# Altium PCB main.PcbDoc
Units mil, origin at the board's own origin, x right, y up, seen from the top; angles counter-clockwise.
Board outline 1730 x 1730 mil, 2 copper layers (Top Layer, Bottom Layer); 27 components, 36 nets, 141 pads, 43 vias.
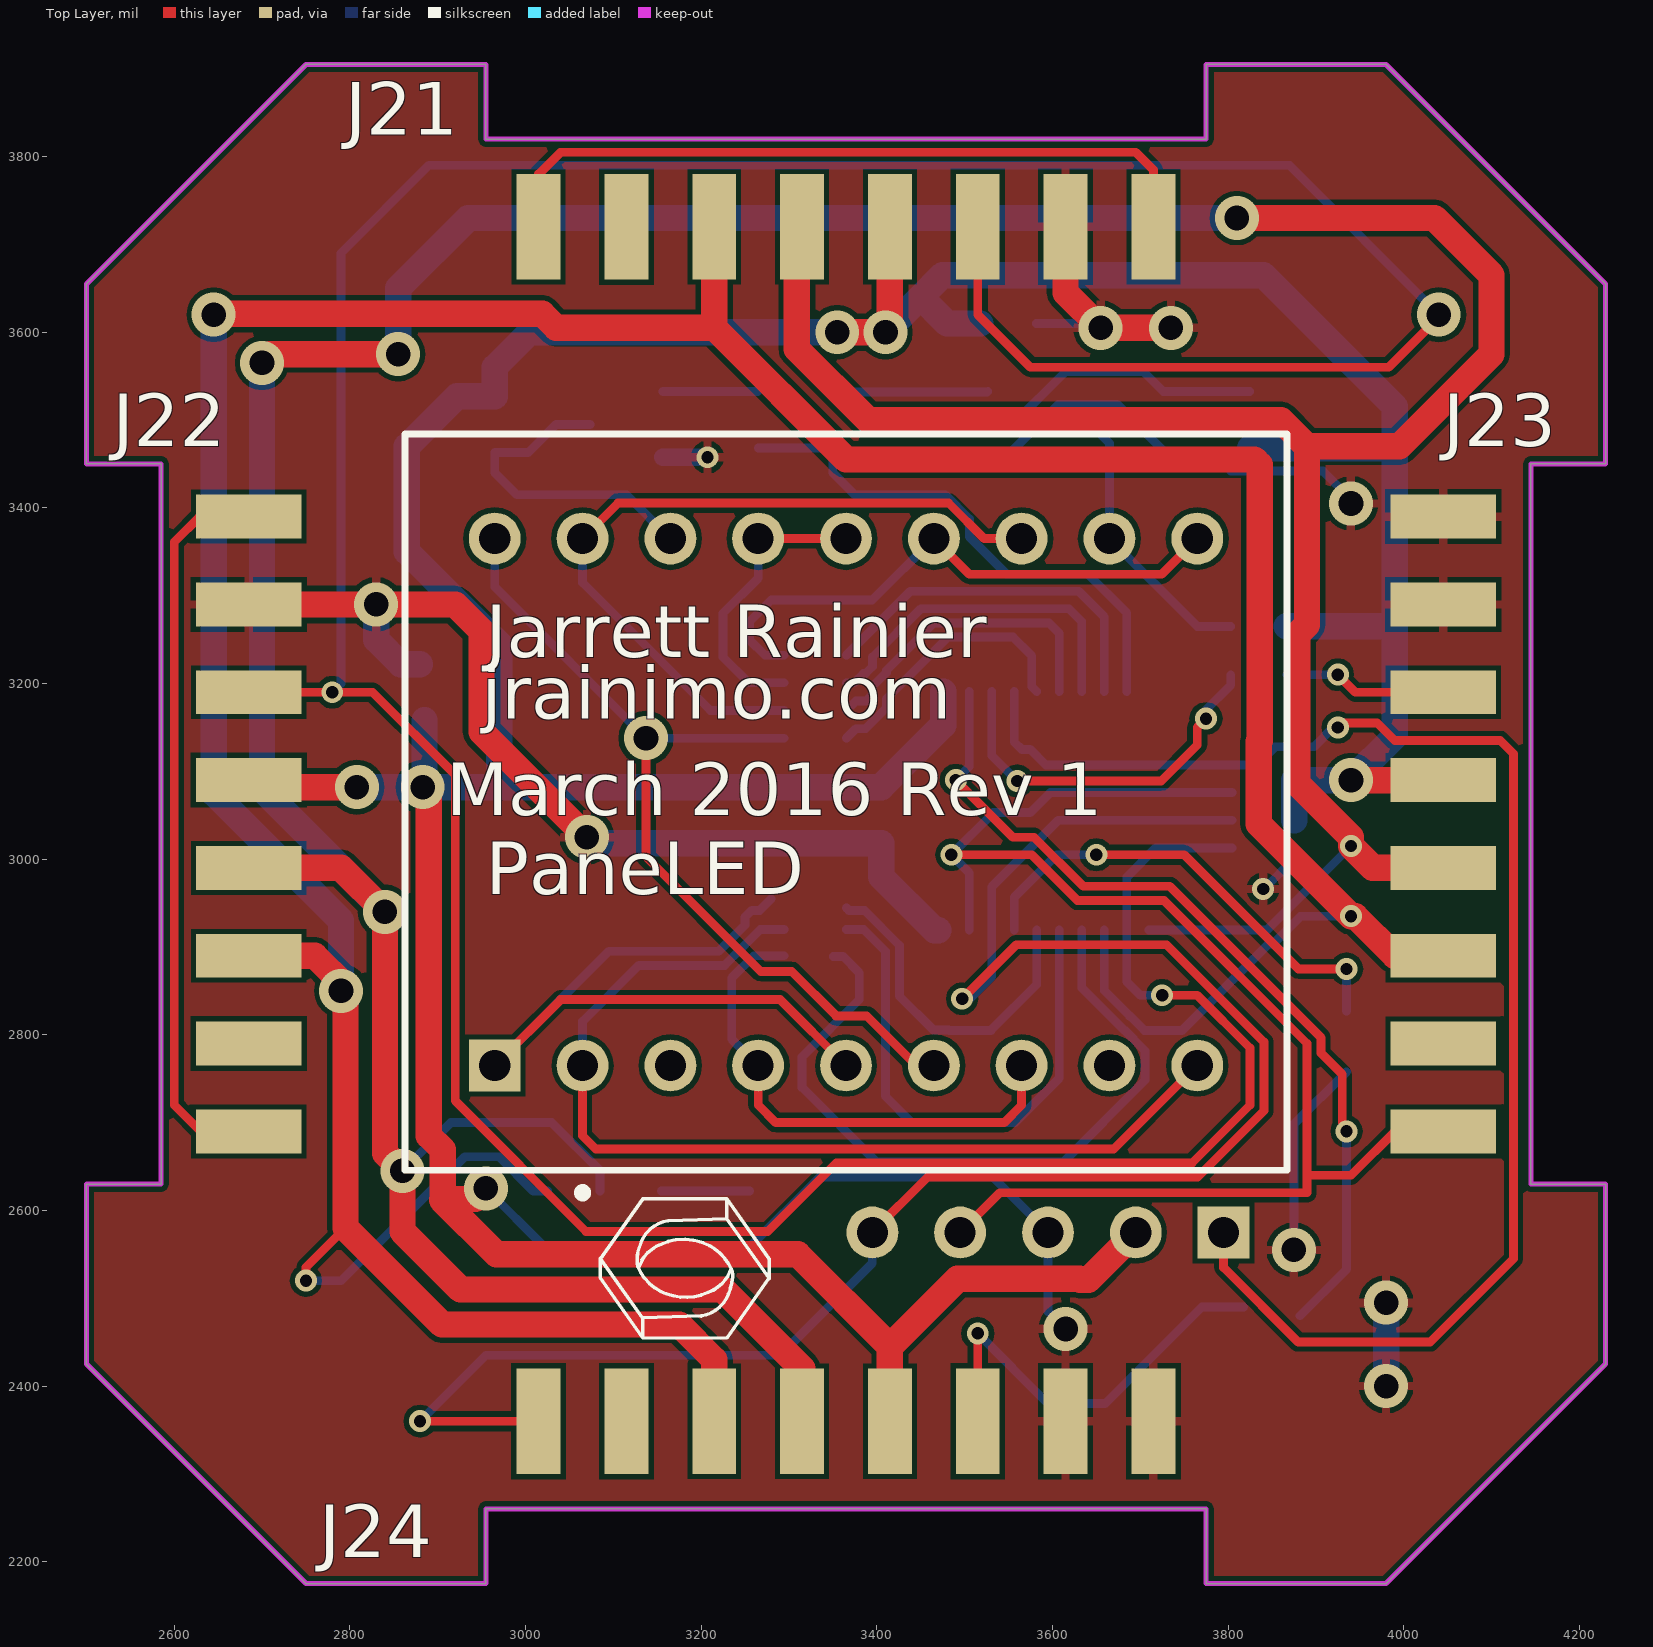
[diagram p0: Top Layer view]
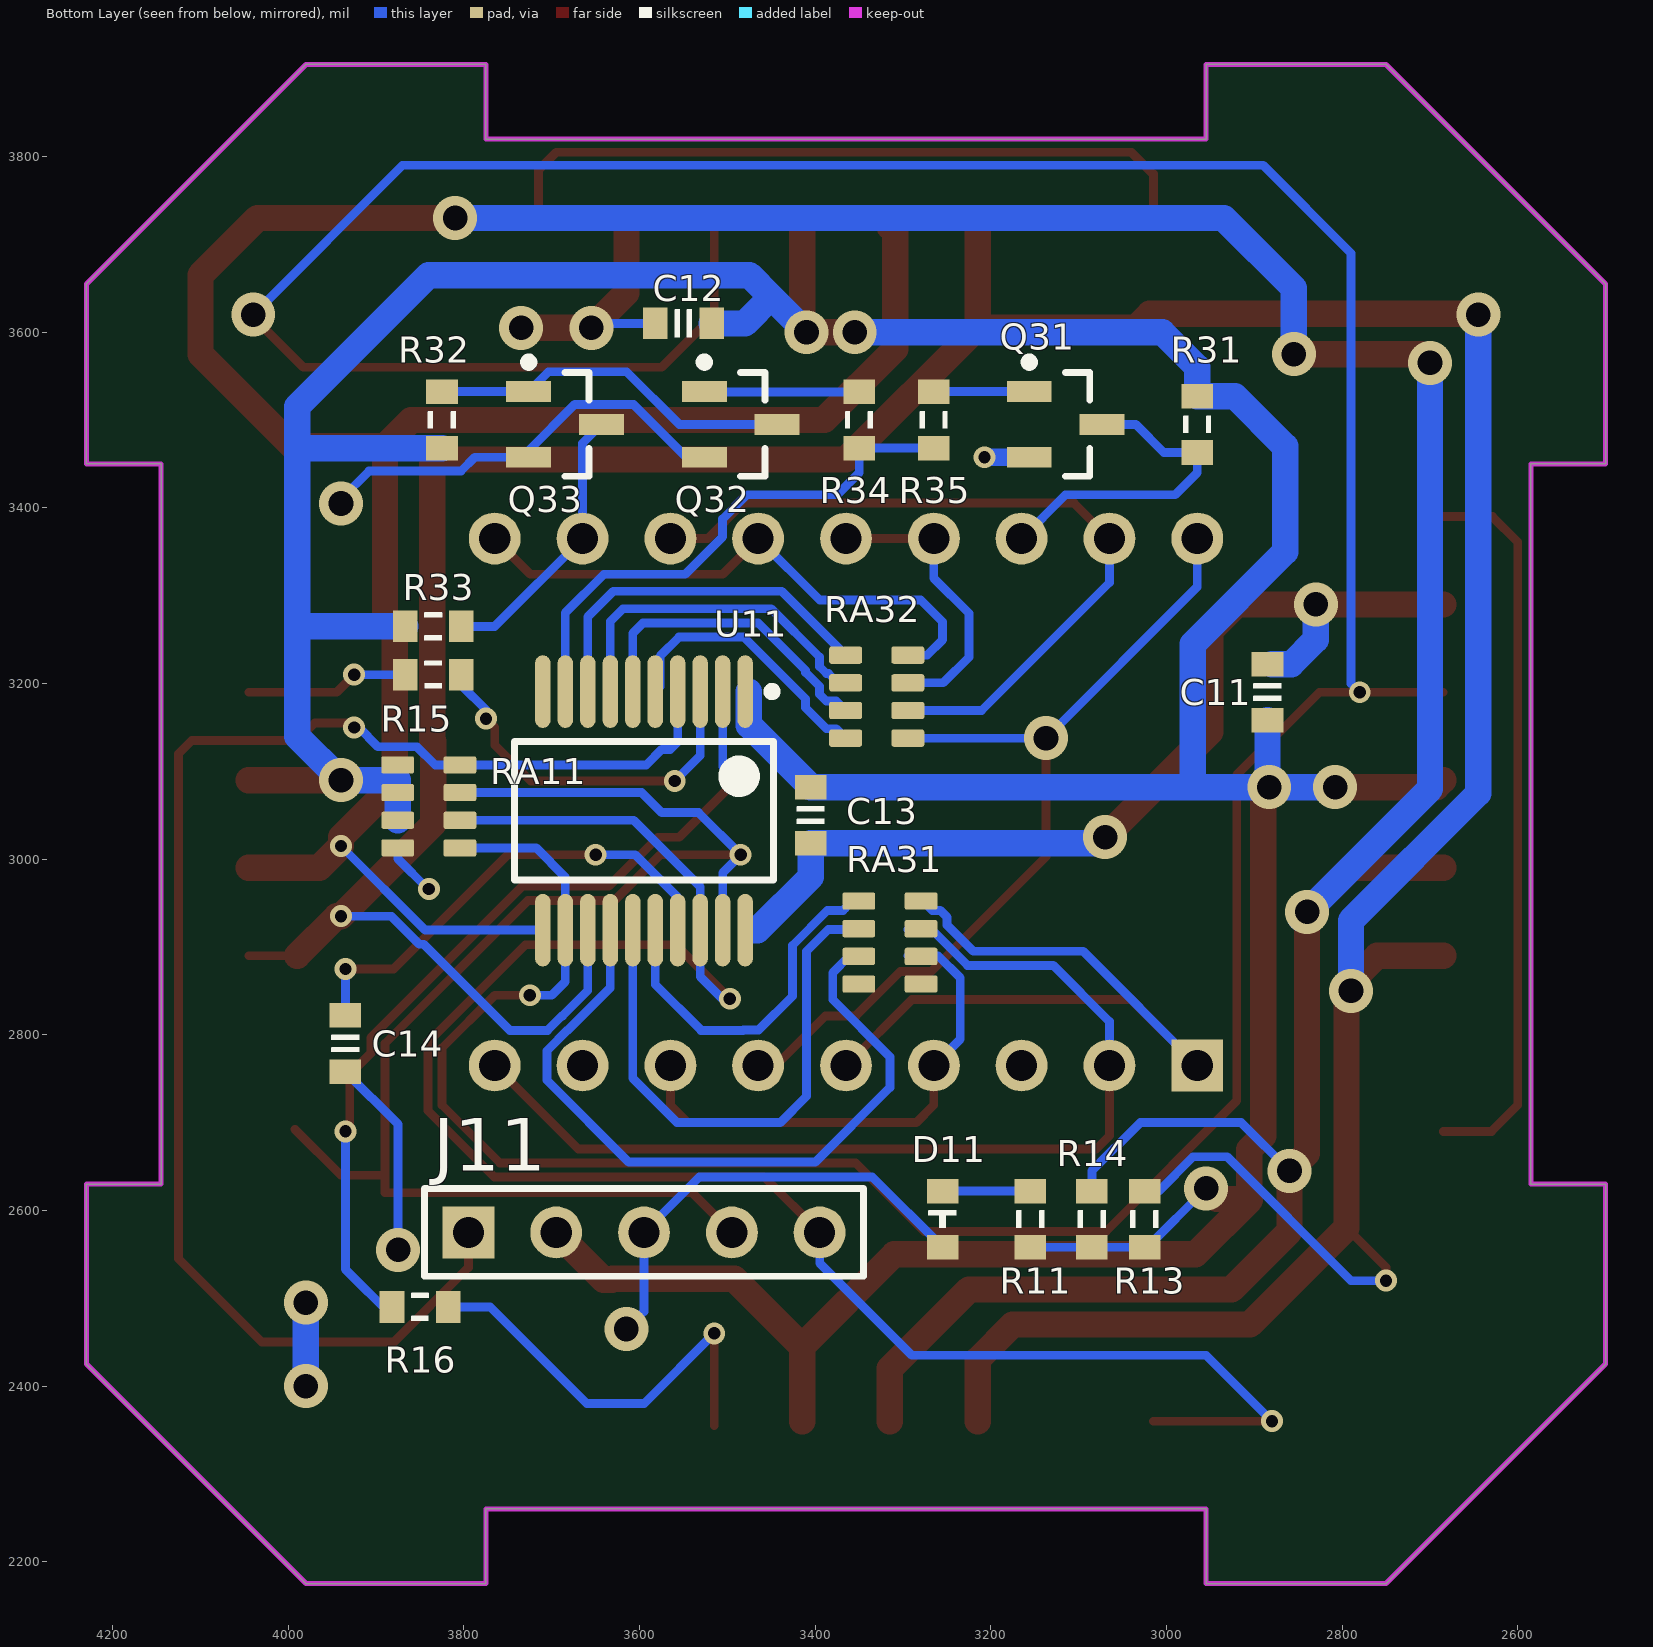
[diagram p1: Bottom Layer view, seen from below]
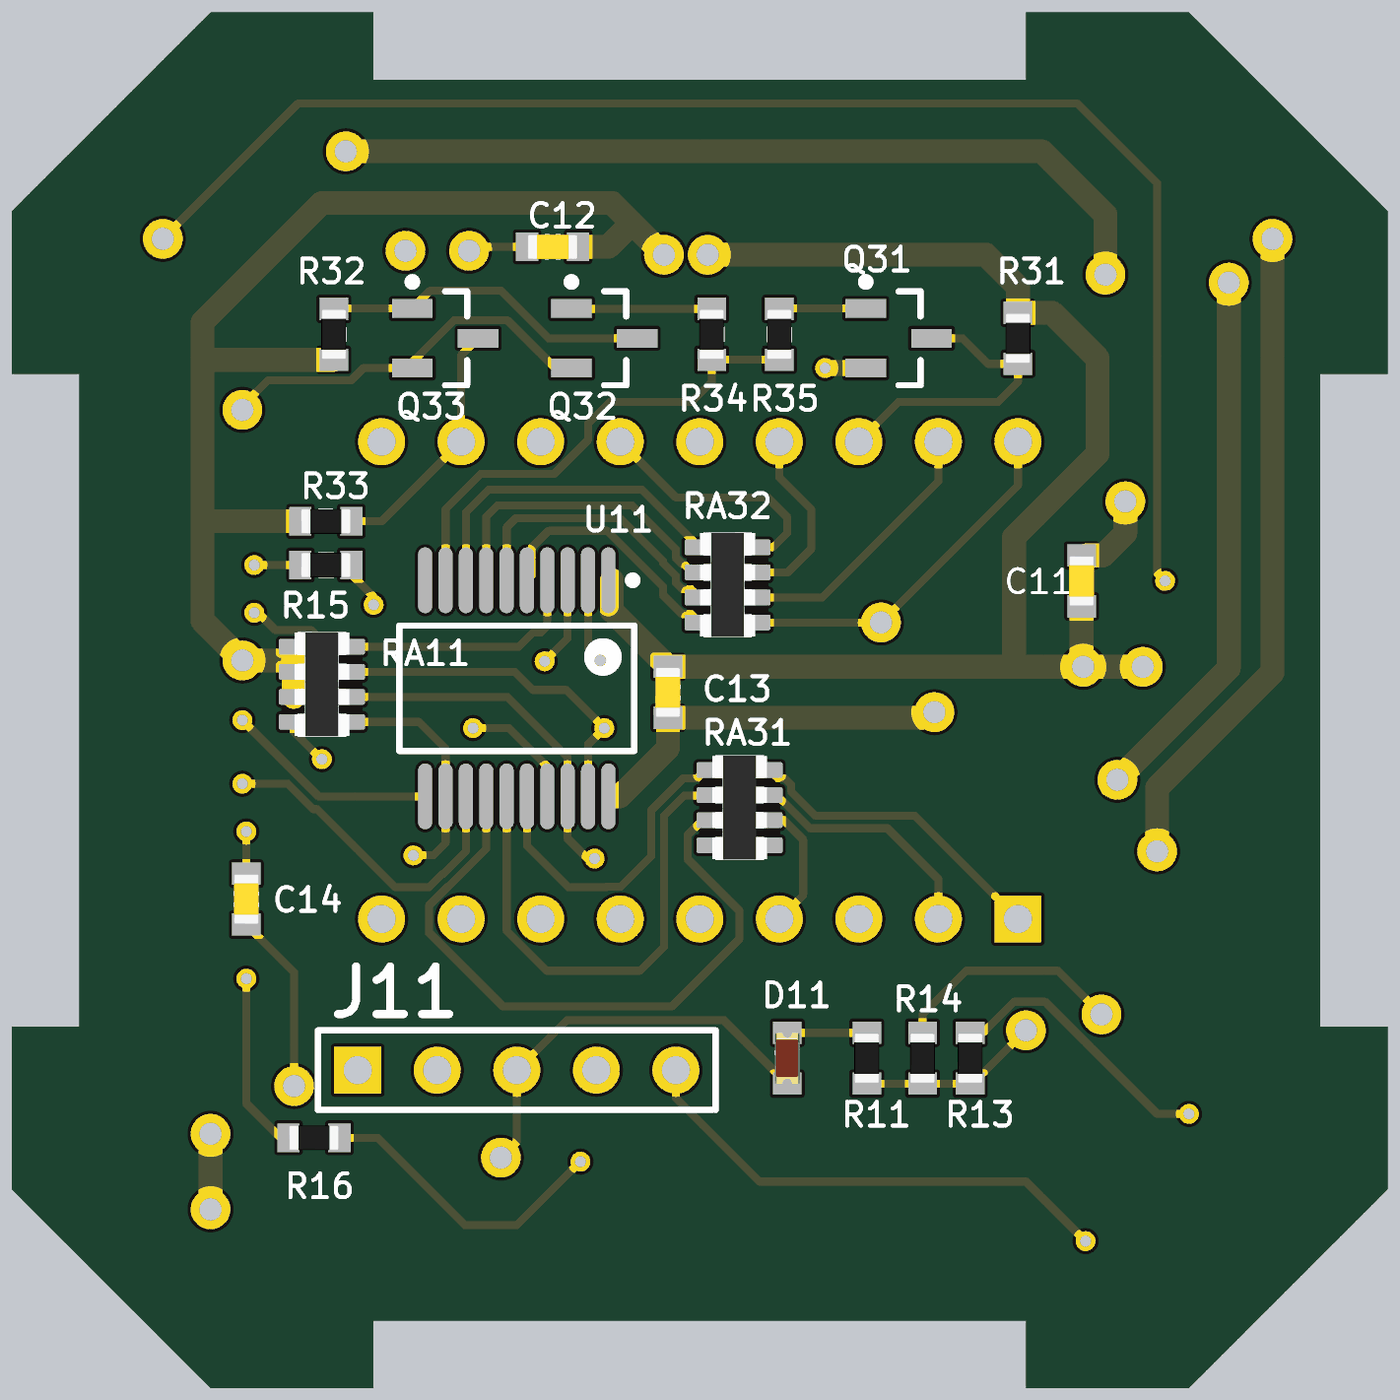
[diagram p2: 3D render of the assembled board from below, using the file's embedded part models]

## Layer stack, top to bottom
Top Layer: signal copper 1.4
Dielectric: dielectric 12.6, FR-4, Dk 4.8
Bottom Layer: signal copper 1.4

## Board outline
2500,2425 2500,2630 2585,2630 2585,3450 2500,3450 2500,3655 2750,3905 2955,3905 2955,3820 3775,3820 3775,3905 3980,3905 4230,3655 4230,3450 4145,3450 4145,2630 4230,2630 4230,2425 3980,2175 3775,2175 3775,2260 2955,2260 2955,2175 2750,2175

## Design rules (kind name [scope] priority, off if disabled: settings)
Clearance [All] p1: gap=6
PolygonConnect [All] p1: connectstyle=Relief reliefconductorwidth=10 reliefentries=4 polygonreliefangle="90 Angle"
RoutingVias [All] p1: holewidth=28 width=50 viastyle="Through Hole" minholewidth=28 minwidth=50 maxholewidth=28 maxwidth=50
SilkscreenOverComponentPads [All] p1: minsilkscreentomaskgap=10
SolderMaskExpansion [All] p1: expansion=4
Width [All] p1: maxlimit=30 minlimit=10 preferedwidth=10
27 further rules are at their usual default settings.

## Classes and differential pairs
component class "1 - main": C11 C12 C13 C14 D11 J11 R11 R13 R14 R15 R16 RA11 U11
component class "2 - ports": J21 J22 J23 J24
component class "3 - display": Q31 Q32 Q33 R31 R32 R33 R34 R35 RA31 RA32

## Components (designator, comment, footprint, x,y, rotation, side; value= is the part's Value field where it differs from the comment)
C11 "Cap_0603" CAP_0603 2885,3190 r270 bottom
C12 "Cap_0603" CAP_0603 3550,3610 r180 bottom
C13 "Cap_0603" CAP_0603 3405,3050 r90 bottom
C14 "Cap_0603" CAP_0603 3935,2790 r90 bottom
D11 "LED_0603" LED_0603_RED 3255,2590 r270 bottom
J11 "Header 5" HDR1X5 3795,2575 r180 bottom
J21 "MALE" HDR1X8_2.54_180H 3365,3720 r90 top
J22 "MALE" HDR1X8_2.54_180H 2685,3040 r180 top
J23 "FEMALE" HDR1X8_2.54_180H 4045,3040 r0 top
J24 "FEMALE" HDR1X8_2.54_180H 3365,2360 r270 top
Q31 "MMBT3904" SOT23_N 3115,3495 r180 bottom
Q32 "MMBT3904" SOT23_N 3485,3495 r180 bottom
Q33 "MMBT3904" SOT23_N 3685,3495 r180 bottom
R11 "Res_0603" RES_0603 3155,2590 r270 bottom
R13 "Res_0603" RES_0603 3025,2590 r270 bottom
R14 "Res_0603" RES_0603 3085,2590 r270 bottom
R15 "Res_0603" RES_0603 3835,3210 r180 bottom
R16 "Res_0603" RES_0603 3850,2490 r0 bottom
R31 "Res_0603" RES_0603 2965,3495 r90 bottom
R32 "Res_0603" RES_0603 3825,3500 r270 bottom
R33 "Res_0603" RES_0603 3835,3265 r0 bottom
R34 "Res_0603" RES_0603 3265,3500 r270 bottom
R35 "Res_0603" RES_0603 3350,3500 r270 bottom
RA11 "Film Res Pack" RESCAXS50P160X320X70-8N 3840,3060 r0 bottom
RA31 "Film Res Pack" RESCAXS50P160X320X70-8N 3315,2905 r180 bottom
RA32 "Film Res Pack" RESCAXS50P160X320X70-8N 3330,3185 r180 bottom
U11 "PIC18F14K50-I/SS" SSOP-SS20_N 3595,3055 r270 bottom

## Footprints (in the part's own frame and the unit in brackets; to place one, negate y for a bottom-side part, rotate by r counter-clockwise, add the part's x,y. Pads: shape width x height; smd on the part's side, far side on the other; paste and mask are expansions set on the pad)
CAP_0603 [mil]
  rect 28x36 smd: 1(-32,0) 2(32,0)
  silkscreen extent -10,-16 10,16, body extent -31,-16 31,16, height 36
HDR1X5 [mm] "Connector; Header; 5 Position"
  rect 1.5x1.5 hole 0.9: 1(0,0)
  round 1.5 hole 0.9: 2(2.54,0) 3(5.08,0) 4(7.62,0) 5(10.16,0)
  silkscreen extent -1.27,-1.27 11.43,1.27
HDR1X8_2.54_180H [mil]
  rect 120x50 smd: 1(0,350) 2(0,250) 3(0,150) 4(0,50) 5(0,-50) 6(0,-150) 7(0,-250) 8(0,-350)
LED_0603_RED [mil]
  rect 28x36 smd: 1(-32,0) 2(32,0)
  silkscreen extent -10,-16 10,16, body extent -32,-16 32,16, height 24
RES_0603 [mil]
  rect 28x36 smd: 1(-32,0) 2(32,0)
  silkscreen extent -10,-16 10,16, body extent -31,-16 32,16, height 20
RESCAXS50P160X320X70-8N [mm] "Resistor Pack, Body 1.6x3.2mm, 4x0603, IPC Medium Density"
  round 0.254 on Mech15: 0(0,0)
  rrect25% 0.95x0.5 smd: 1(-0.9,1.2) 2(-0.9,0.4) 3(-0.9,-0.4) 4(-0.9,-1.2) 5(0.9,-1.2) 6(0.9,-0.4) 7(0.9,0.4) 8(0.9,1.2)
  Top Layer pour cut-out: -0.4,1.7 0.4,1.7 0.4,-1.7 -0.4,-1.7
  body extent -0.87,-1.68 0.88,1.67, height 0.7
SOT23_N [mm] "SOT23, 3-Leads, Body 2.9x1.3mm, Pitch 0.95mm, Lead Span 2.3mm, IPC Medium Density"
  rect 1.3x0.6 smd: 1(-1.05,0.95) 2(-1.05,-0.95) 3(1.05,0)
  silkscreen extent -1.18,-1.5 0.7,1.92, body extent -0.7,-1.5 0.7,1.5, height 1.1
SSOP-SS20_N [mm] "SOP, 20-Leads, Body 7.2x5.2mm, Pitch 0.65mm, IPC Medium Density"
  oval 2.1x0.45 smd: 1(-3.45,2.925) 2(-3.45,2.275) 3(-3.45,1.625) 4(-3.45,0.975) 5(-3.45,0.325) 6(-3.45,-0.325) 7(-3.45,-0.975) 8(-3.45,-1.625) 9(-3.45,-2.275) 10(-3.45,-2.925) 11(3.45,-2.925) 12(3.45,-2.275) 13(3.45,-1.625) 14(3.45,-0.975) 15(3.45,-0.325) 16(3.45,0.325) 17(3.45,0.975) 18(3.45,1.625) 19(3.45,2.275) 20(3.45,2.925)
  silkscreen extent -3.57,-3.75 2,3.82, body extent -2.7,-3.75 2.7,3.75, height 2

## Part data
C11 C12 C13 C14: "Capacitor"
D11: "LED"
J11: "Header, 5-Pin"
J21 J22 J23 J24: library part HDR1x8_2.54, "Header"
Q31 Q32 Q33: "NPN Switching Transistor"
R11 R13 R14 R15 R16 R31 R32 R33 R34 R35: "Resistor"
RA11 RA31 RA32: library part RESPACK_1K_5%_4X, "Resistor array 1K Ohm 4-pack 62.5mW 5% 4x1608 SMD"
U11: "USB Flash Microcontroller with nanoWatt XLP Technology, 20-pin SSOP, Industrial Temperature"

## Free pads (board coordinates)
  rect 59.06x59.06 hole 35.43: 1(2965,2765)
  round 59.06 hole 35.43: 2(3065,2765) 3(3165,2765) 4(3265,2765) 5(3365,2765) 6(3465,2765) 7(3565,2765) 8(3665,2765) 9(3765,2765) 10(3765,3365) 11(3665,3365) 12(3565,3365) 13(3465,3365) 14(3365,3365) 15(3265,3365) 16(3165,3365) 17(3065,3365) 18(2965,3365)

## Via types
v1: diameter 50, hole 28, Top Layer to Bottom Layer, 24 vias
v2: diameter 25, hole 14, Top Layer to Bottom Layer, 19 vias

## Nets (pads, with @x,y where several pads share a name; then routed paths per layer and width w, separated by ;. In a path a pad name is that pad's centre, name@x,y a point inside that pad or via, vN(x,y) a via of type N, cw(c..) or ccw(c..) an arc to the next point about the centre after c; other vN are vias at no path point)
GND: C11.1 C12.1 C13.1 C14.1 D11.2 J11.3 J21.7 J22.7 J23.1 J23.2 J24.1 J24.2 Q31.2 Q32.2 Q33.2 RA11.8 U11.20 | length 2888.9
  Top Layer w10: v1(3940,3405) v1@3945,3400
  Top Layer w30: J22.7 v1(2830,3290) 2920,3290 2950,3260 2950,3145 v1(3070,3025) ; J21.7 3615,3645 v1(3655,3605) v1(3735,3605)
  Bottom Layer w10: D11.2 3335,2638 3532,2638 J11.3 3595,2485 v1(3615,2465) 3605,2455 v1@3605,2460 ; Q32.2 3546.86,3457.6 3607.07,3517.81 3673.81,3517.81 3726.34,3465.28 Q33.2 3787.85,3457.6 3803.44,3442 3908,3442 3940,3410 v1(3940,3405) ; C12.1 3650,3610 v1(3655,3605) ; v2(3840,2965.91) 3840.91,2965.91 3875.43,3000.43 RA11.8 ; v1(3875,2555) 3875,2698 C14.1
  Bottom Layer w20: Q31.2 v2(3207.4,3457.6)
  Bottom Layer w30: v1(2830,3290) 2830,3250 2858,3222 C11.1@2880,3222 ; v1(3070,3025) 3077,3018 C13.1 3405,2980 3465.83,2919.17 3470,2919.17 ; v1(3980,2400) v1(3980,2495)
K1: pad.16 Q31.3 R31.1 | length 376
  Bottom Layer w10: Q31.3 3035,3495 3003,3463 R31.1 2965,3440 2990,3415 3115,3415 pad.16
K2: pad.11 Q33.3 R33.1 | length 318.3
  Bottom Layer w10: Q33.3 3665,3473.66 pad.11 3765,3265 R33.1
LSET: J24.3 R16.1 | length 486.7
  Top Layer w10: J24.3@3515,2355 J24.3 v2(3515,2460)
  Bottom Layer w10: v2(3515,2460) 3595,2380 3660,2380 3770,2490 R16.1
NetC14_2: C14.2 U11.17 | length 542.7
  Top Layer w10: v2(3650,3005) 3750,3005 3880,2875 v2(3935,2875) v2@3935,2880
  Bottom Layer w10: U11.17 3556.61,2956.61 3605,3005 v2(3650,3005) ; C14.2@3935,2827 v2(3935,2875)
NetD11_1: D11.1 R11.1 | length 100
  Bottom Layer w10: R11.1 D11.1
NetJ21_1: J21.1 J21.8 | length 843.6
  Top Layer w10: J21.1 3015,3780 3040,3805 3695,3805 3715,3785 J21.8
NetJ22_1: J22.1 J22.8 | length 835.5
  Top Layer w10: J22.1 2630,2690 2600,2720 2600,3361.05 2628.95,3390 J22.8
NetQ31_1: Q31.1 R34.1 | length 108.3
  Bottom Layer w10: Q31.1 R34.1@3264.6,3532.4
NetQ32_1: Q32.1 R35.1 | length 176.5
  Bottom Layer w10: R35.1 3525.94,3532 Q32.1
NetQ32_3: Q32.3 Q33.1 R32.1 | length 415.2
  Bottom Layer w10: Q32.3 3555,3495 3615,3555 3703.74,3555 Q33.1 R32.1@3824.6,3532.4
NetR15_2: R15.2 U11.3 | length 431.6
  Top Layer w10: v2(3560,3088.98) 3723.98,3088.98 3765,3130 3765,3150 v2(3775,3160)
  Bottom Layer w10: U11.3 3531.02,3117.95 v2(3560,3088.98) ; v2(3775,3160) 3775,3170 3803,3198 R15.2
NetR16_2: R16.2 U11.2 | length 983.3
  Top Layer w10: v2(3490,3090) 3555,3025 3579.09,3025 3635.09,2969 3733.63,2969 3906,2796.63 3906,2779 3930,2755 v2@3930,2700
  Bottom Layer w10: v2(3490,3090) 3505.43,3105.43 U11.2 ; R16.2@3882,2480 3935,2533 v2(3935,2690)
PGC: J11.5 J24.8 RA11.2 U11.18 | length 2207.9
  Top Layer w10: v2(2880,2360) J24.8 ; J11.5 3458,2638 3765.63,2638 3841,2713.37 3841,2791.63 3730,2902.63 3558.85,2902.63 v2(3497.23,2841)
  Bottom Layer w10: v2(2880,2360) 2955,2435 3290,2435 3395,2540 J11.5 ; v2(3497.23,2841) 3506,2841 3531.02,2866.02 U11.18 3531.02,2968.4 3606.88,3044.25 RA11.2
PGD: J11.4 J23.8 RA11.3 U11.19 | length 1645.1
  Top Layer w10: v2(3485,3005) 3576.46,3005 3628.46,2953 3727,2953 3890,2790 3890,2640 ; J11.4 3540,2620 3890,2620 3890,2640 ; J23.8@3992.5,2692.5 3940,2640 3890,2640
  Bottom Layer w10: U11.19 3505.43,2984.57 v2(3485,3005) 3532.98,3052.98 3574.91,3052.98 3597.68,3075.75 RA11.3
RC0: RA31.1 U11.16 | length 391.9
  Bottom Layer w10: RA31.1@3365.43,2944.57 3368.41,2941.59 3386.04,2941.59 3426,2901.63 3426,2844 3464.47,2805.53 3481.79,2805.53 3482.31,2805 3530,2805 3582.2,2857.2 U11.16
RC1: RA31.2 U11.15 | length 619.7
  Bottom Layer w10: RA31.2@3365.43,2920 3385,2920 3410,2895 3410,2730 3440,2700 3557.31,2700 3607.8,2750.48 U11.15
RC2: RA31.3 U11.14 | length 860.6
  Bottom Layer w10: RA31.3 3361.6,2889.25 3380.13,2870.71 3380.13,2840.13 3315,2775 3315,2740 3400,2655 3612.31,2655 3705.53,2748.21 3705.53,2781.79 3681.79,2805.53 3681.24,2805.53 3633.39,2853.39 U11.14
RC3: RA32.2 U11.7 | length 395
  Bottom Layer w10: RA32.2 3374.3,3200.75 3384.96,3211.4 3387.25,3211.4 3395.13,3219.29 3395.13,3230.13 3450,3285 3619,3285 3633.39,3270.61 U11.7
RC4: RA32.3 U11.6 | length 361.5
  Bottom Layer w10: RA32.3 3376.09,3179.91 3387.25,3179.91 3395.13,3187.79 3395.13,3196.66 3411.13,3212.66 3411.13,3214.95 3465.18,3269 3596,3269 3607.8,3257.2 U11.6
RC5: RA32.4 U11.5 | length 316.8
  Bottom Layer w10: RA32.4 3376.09,3148.41 3387.25,3148.41 3411.13,3172.29 3411.13,3182.68 3481.45,3253 3555,3253 3576.47,3231.53 3576.47,3196.56 U11.5
RC6: RA32.1 U11.8 | length 420.9
  Bottom Layer w10: RA32.1 3438.19,3305 3630,3305 3658.98,3276.02 U11.8
RC7: R34.2 R35.2 U11.9 | length 615.1
  Bottom Layer w10: R34.2 R35.2 3350,3440 3375,3415 3477.84,3415 3505.53,3387.31 3505.53,3367.16 3548.21,3324.47 3640.53,3324.47 3684.57,3280.43 U11.9
RSET: J23.3 R15.1 | length 186.3
  Top Layer w10: v2(3925,3210) 3945,3190 J23.3
  Bottom Layer w10: R15.1 v2(3925,3210)
SCL: J21.4 J22.4 J23.5 J24.5 R14.1 U11.11 | length 5635.7
  Top Layer w30: J22.4 2790,2990 v1(2840,2940) 2840,2665 v1(2860,2645) 2860,2576 2926,2510 3225,2510 3315,2420 J24.5 ; v1(2700,3565) 2710,3575 v1(2855,3575) ; J21.4 3309,3714 3309,3580.95 3389.95,3500 3860,3500 3890,3470 ; v1(3810,3730) 4035,3730 4100,3665 4100,3575 3995,3470 3890,3470 ; J23.5 3965,2990 v2(3940,3015) 3940,3024.95 3879,3085.95 3879,3256 3890,3267 3890,3470
  Bottom Layer w10: v1(2860,2645) 2915,2700 3030,2700 3085,2645 R14.1 ; U11.11 3844.17,2919.17 v2(3940,3015)
  Bottom Layer w30: v1(2700,3565) 2700,3080 v1@2847.5,2932.5 ; v1(2855,3575) 2855,3650 2935,3730 v1(3810,3730)
SDA: J21.3 J22.3 J23.6 J24.6 R13.1 U11.13 | length 4691.5
  Top Layer w10: v2(2750,2520) 2750,2535 2795,2580 ; v2(3940,2935) v2@3945,2935 ; J23.6@3990,2890 J23.6
  Top Layer w30: v1(2645,3620) 2646,3621 3019,3621 3035,3605 3215,3605 ; J22.3 2760,2890 2795,2855 2795,2580 2905,2470 3175,2470 3215,2430 J24.6 ; J21.3 3215,3605 ; v2(3940,2935) 3835,3040 3835,3133.95 3836,3134.95 3836,3449 3830,3455 3365,3455 3215,3605 ; v2@3945,2935 J23.6@3990,2890
  Bottom Layer w10: v2(2750,2520) 2790,2520 2931,2661 2969.91,2661 3008.91,2622 R13.1 ; U11.13 3658.98,2850.42 3687.87,2821.53 3688.41,2821.53 3704.94,2805 3747.69,2805 3845.86,2903.17 3850.8,2903.17 3882.63,2935 v2(3940,2935)
  Bottom Layer w30: v1(2645,3620) 2645,3075 2790,2930 v1(2790,2850)
SEGA: pad.12 pad.17 RA32.6 | length 873.5
  Top Layer w10: pad.17 3105.53,3405.53 3481.79,3405.53 3522.31,3365 pad.12
  Bottom Layer w10: pad.17 3065,3315 3210.75,3169.25 RA32.6
SEGB: pad.10 pad.13 RA32.8 | length 649.8
  Top Layer w10: pad.13 3505.53,3324.47 3724.47,3324.47 pad.10
  Bottom Layer w10: RA32.8 3272.76,3232.24 3255,3250 3255,3270 3280,3295 3395,3295 pad.13
SEGC: pad.2 pad.9 RA31.7 | length 1148.6
  Top Layer w10: pad.2 3065,2685 3080,2670 3670,2670 pad.9
  Bottom Layer w10: pad.2 3065,2815 3129,2879 3226.63,2879 3267.63,2920 RA31.7@3294.57,2920
SEGD: pad.4 pad.7 RA31.6 | length 588.8
  Top Layer w10: pad.4 3265,2720 3285,2700 3545,2700 3565,2720 pad.7
  Bottom Layer w10: pad.4 3235,2795 3235,2864.75 3260.25,2890 RA31.6@3294.57,2890
SEGE: pad.1 pad.5 RA31.8 | length 861
  Top Layer w10: pad.1 3040,2840 3290,2840 pad.5
  Bottom Layer w10: pad.1 3095,2895 3220,2895 3249.87,2924.87 3249.87,2933.71 3257.75,2941.59 3266.59,2941.59 RA31.8@3280,2955
SEGF: pad.6 pad.18 RA32.5 | length 1017.2
  Top Layer w10: v1(3137.24,3137.76) 3137.24,3002.76 3268,2872 3303.25,2872 3353.73,2821.53 3388.41,2821.53 3444.94,2765 pad.6
  Bottom Layer w10: pad.18 2965,3310 v1(3137.24,3137.76) RA32.5
SEGG: pad.14 pad.15 RA32.7 | length 333.3
  Top Layer w10: pad.15 pad.14
  Bottom Layer w10: pad.15 3265,3320 3225,3280 3225,3230 3254.25,3200.75 RA32.7
SETUP: J21.6 J22.6 RA11.1 U11.12 | length 4703.3
  Top Layer w10: J22.6 v2(2780,3190) 2825.91,3190 2920,3095.91 2920,2725 3069,2576 3276,2576 3354,2654 3759,2654 3825,2720 3825,2785 3765,2845 v2(3725,2845) ; J21.6 3515,3620 3575,3560 3983,3560 4040,3617 v1(4040,3620)
  Bottom Layer w10: v2(2780,3190) 2790,3200 2790,3690 2890,3790 3870,3790 v1(4040,3620) ; v2(3725,2845) 3700,2845 3684.57,2860.43 U11.12 3684.57,2979.57 3717.76,3012.76 RA11.1
VCC: C11.2 C12.2 C13.2 J11.2 J21.5 J22.5 J23.4 J24.4 R11.2 R13.2 R14.2 R31.2 R32.2 R33.2 RA11.5 RA11.6 RA11.7 U11.1 | length 5568.8
  Top Layer w30: J22.5 2693,3082 v1(2808,3082) ; v1(2883,3082) 2890,3075 2890,2685 2906,2669 2906,2613 2943,2613 v1(2955,2625) ; 2905,2612 2967,2550 3310,2550 3415,2445 ; v1(3355,3600) v1(3410,3600) 3415,3605 J21.5 ; J24.4 3415,2445 ; J11.2 3641,2521 3631.68,2521 3630.68,2522 3492,2522 3415,2445 ; v1(3940,3090) J23.4
  Bottom Layer w10: v1(2955,2625) 3022,2558 R13.2 R14.2 R11.2
  Bottom Layer w30: v1(2808,3082) v1(2883,3082) ; C11.2 2885,3084 v1(2883,3082) ; v1(3355,3600) 3005,3600 2965,3560 R31.2 2922,3527 2865,3470 2865,3350 2970,3245 2970,3082 ; v1(3410,3600) 3450,3640 ; U11.1@3475.57,3190.83 3475.57,3152.57 C13.2 2970,3082 ; C12.2 3480,3610 3450,3640 ; R32.2 3987,3468 3990,3465 ; R33.2 3990,3265 ; RA11.7 RA11.6 3875.43,3090 v1(3940,3090) 3990,3140 3990,3265 ; v1(2883,3082) 2970,3082 ; 3450,3640 3475,3665 3840,3665 3990,3515 3990,3465 ; 3990,3265 3990,3465
VPP: J11.1 RA11.4 U11.4 | length 1690.5
  Top Layer w10: J11.1 3795,2535 3880,2450 4030,2450 4125,2545 4125,3120 4110,3135 3990,3135 3970,3155 3930,3155 v2(3925,3150)
  Bottom Layer w10: U11.4 3556.61,3133.39 3565.02,3124.98 3574.91,3124.98 3592.64,3107.24 RA11.4 3832.77,3107.24 3853.62,3128.09 3898.09,3128.09 3920,3150 v2(3925,3150)
pads on no net: J21.2 J22.2 J23.7 J24.7 RA11.0 RA31.0 RA31.4 RA31.5 RA32.0 U11.10

## Polygon pours and split planes (outlines as drawn)
GND on Top Layer "Bottom Layer-No Net" (solid, remove dead copper, pour order 2): 2955,2175 2750,2175 2500,2425 2500,2630 2585,2630 2585,3450 2500,3450 2500,3655 2750,3905 2955,3905 2955,3820 3775,3820 3775,3905 3980,3905 4230,3655 4230,3450 4145,3450 4145,2630 4230,2630 4230,2425 3980,2175 3775,2175 3775,2260 2955,2260

## Keep-outs
Keep-Out Layer:
  the board outline again, w5.91

## Silkscreen, mask and mechanical layers (free items; w line width, h text height)
Top Overlay:
  circle w9.84: c3065,2620.12 r4.92
  lines w3.94: 3085.6,2545.07 3133.65,2613.19 ; 3127.25,2548.87 3128.74,2555.43 3131.56,2563.41 cw(c3168.85,2548.95) 3162.74,2588.48 ; 3127.43,2538.64 3127.1,2541.27 3127.15,2545.71 3128.02,2551.46 ; 3127.78,2536.22 3128.2,2535.19 ; 3127.96,2535.57 ccw(c3179.5,2557.64) 3160.29,2504.97 ccw(c3182.45,2565.74) 3200.04,2503.49 ; 3128.77,2534.67 3134.25,2545.85 ; 3132.57,2543.78 3138.59,2551.44 3149.08,2559.19 3162.73,2564.71 ; 3132.99,2455.62 3085.12,2523.49 3085.12,2545.55 3133.29,2477.39 ; 3133.37,2454.73 3229.27,2454.73 3277.52,2523.13 ; 3133.37,2477.72 3133.66,2477.72 3133.66,2455.01 ; 3133.5,2477.57 3133.57,2477.57 ; 3133.5,2613.47 3229.4,2613.47 ; 3133.64,2477.56 3200,2480 ; 3162.77,2588.2 3229.13,2590.64 3277.18,2523.13 ; 3200.03,2479.72 ccw(c3193.92,2519.25) 3231.22,2504.79 ; 3202.39,2562.97 cw(c3183.25,2510.53) 3234.56,2532.52 ; 3202.48,2563.23 3191.13,2566.24 3182.13,2567.11 3170.97,2566.48 3162.73,2564.71 ; 3213.7,2509.02 3224.18,2516.77 3230.2,2524.42 3234.27,2533.45 ; 3219.9,2513.39 3210.91,2507.89 3199.97,2503.76 ; 3228.68,2591.23 3228.82,2591.23 ; 3229.12,2613.19 3229.12,2590.48 3229.4,2590.48 ; 3229.39,2612.9 3277.27,2545.03 ; 3233.29,2511.27 3234.75,2516.75 3235.62,2522.49 ; 3234.04,2512.77 3231.22,2504.79 ; 3234.99,2531.98 3235.5,2530.22 3235.95,2526.95 3235.97,2523.53 ; 3277.55,2522.08 3277.55,2545.12 ; 3162.73,2564.71 3162.81,2564.44 3162.73,2564.71 ; 3199.97,2503.76 3200.04,2503.49 ; 3199.97,2503.76 3200.04,2503.49 ; 3199.97,2503.76 3200.04,2503.49 ; 3199.97,2503.76 3200.04,2503.49 ; 3230.96,2504.9 3231.22,2504.79 ; 3230.96,2504.9 3231.22,2504.79 ; 3230.96,2504.9 3231.22,2504.79 ; 3230.96,2504.9 3231.22,2504.79
  lines w7.87: 2863.03,2645.71 3866.97,2645.71 3866.97,3484.29 2863.03,3484.29 2863.03,2645.71
  text "Jarrett Rainier" at 2955,3230 h60
  text "jrainimo.com" at 2950,3159.99 h60
  text "March 2016 Rev 1" at 2910,3050 h60
  text "PaneLED" at 2955,2960 h60
Mechanical 13:
  lines w3.94: 2863.03,2645.71 2863.03,3484.29 3866.97,3484.29 3866.97,2645.71 2863.03,2645.71